# Altium PCB STM32F429.PcbDoc (part 1 of 2)
Units mm, origin at the board's own origin, x right, y up, seen from the top; angles counter-clockwise.
Board outline 66.8 x 95.4 mm, 2 copper layers (Top Layer, Bottom Layer); 134 components, 138 nets, 653 pads, 375 vias.
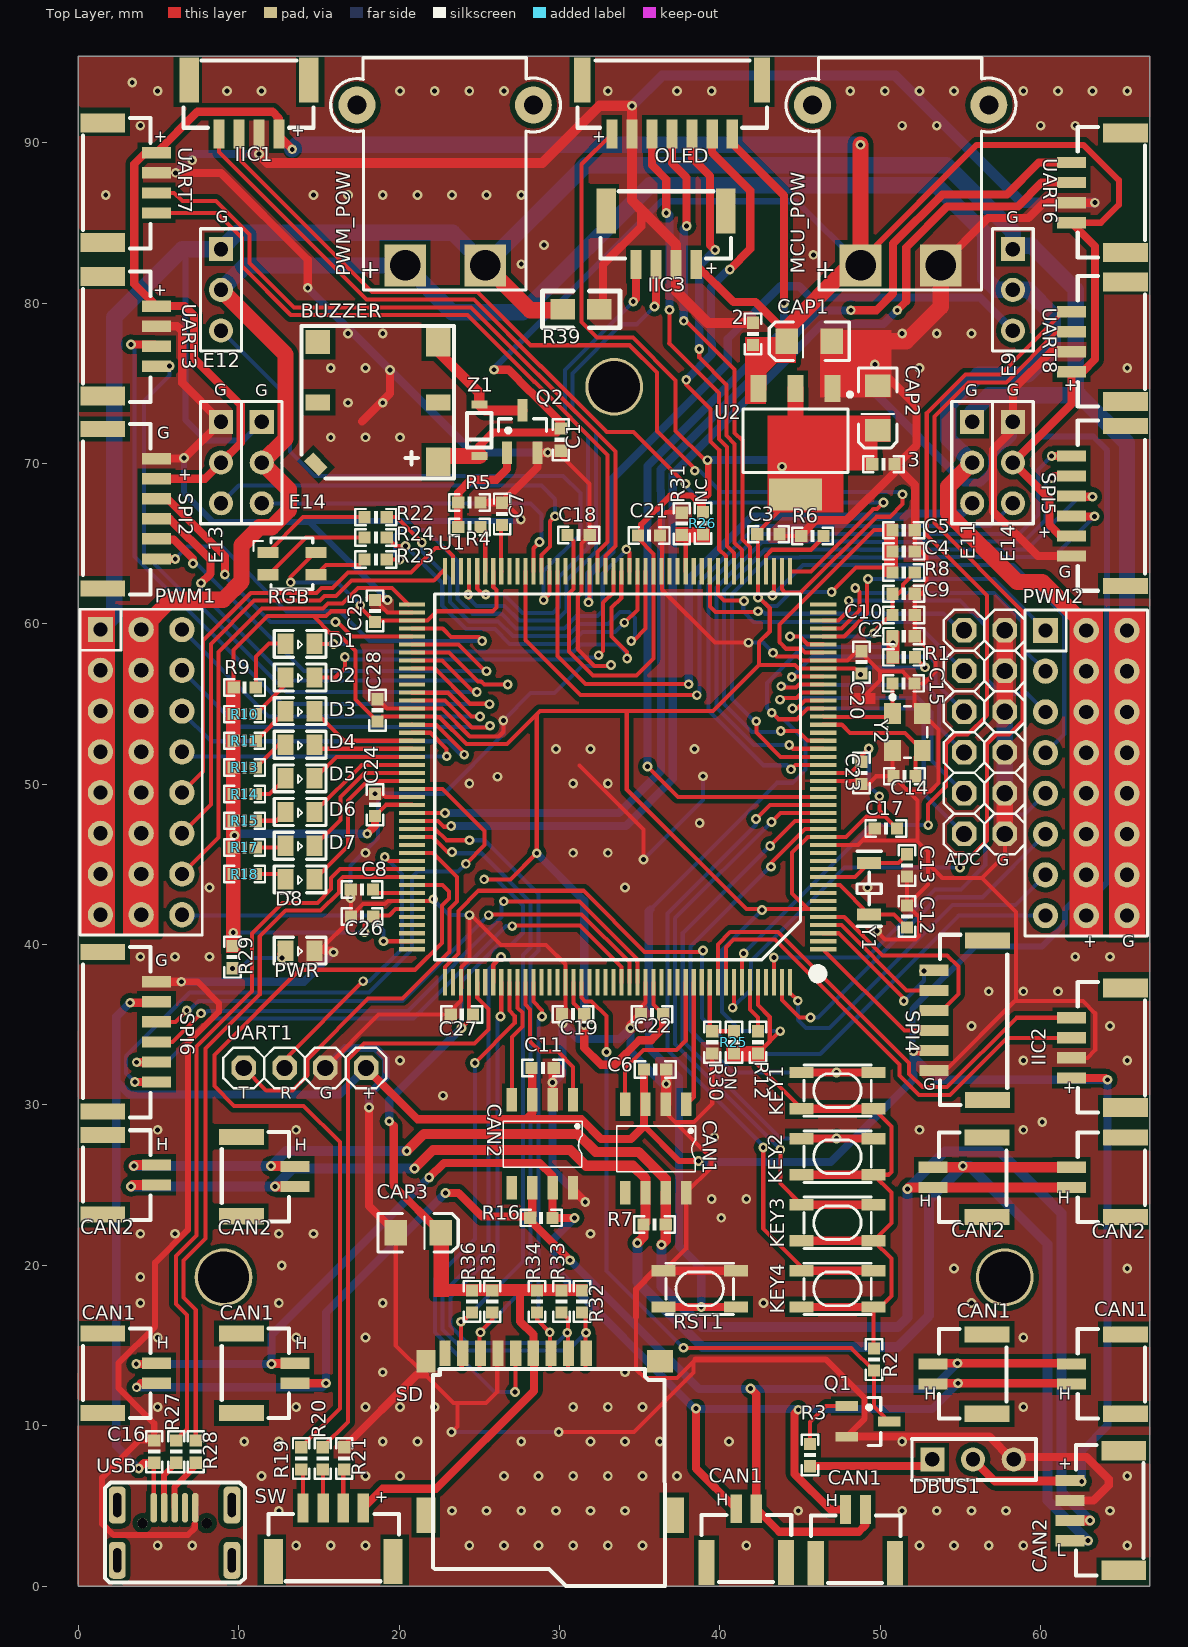
[diagram p0: Top Layer view]
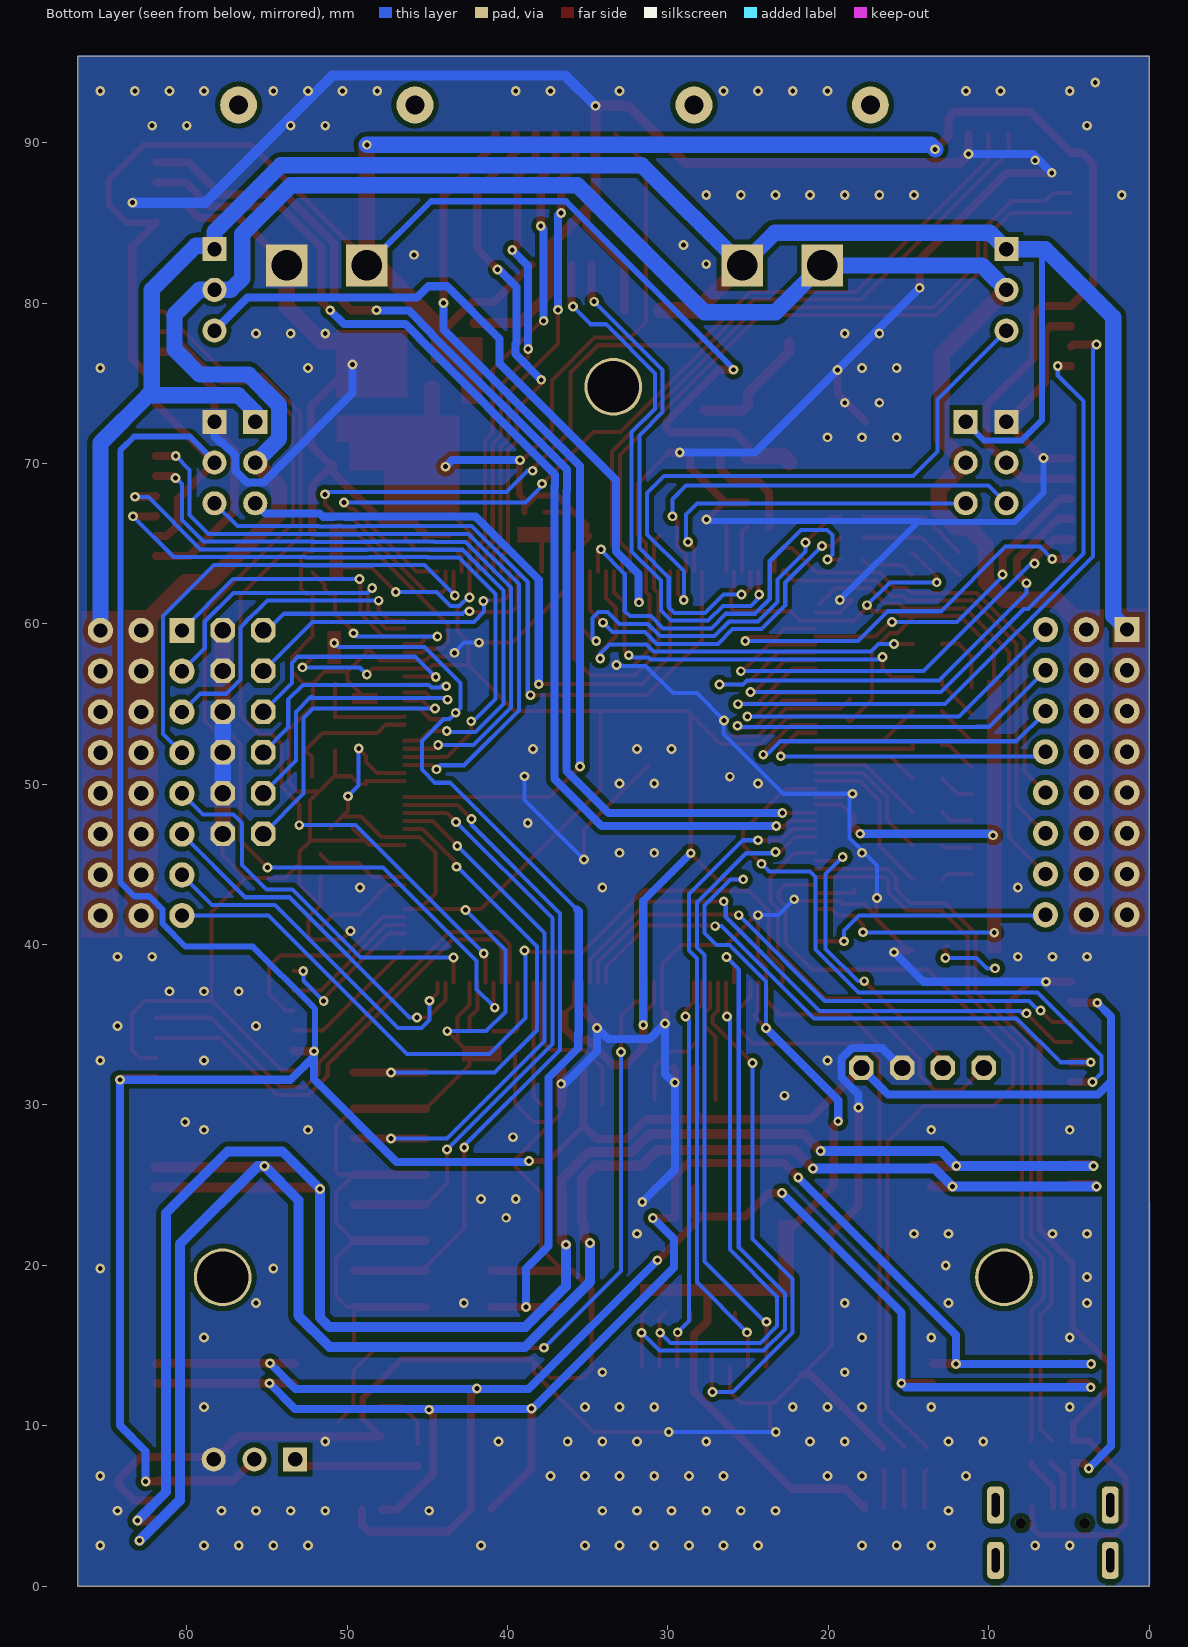
[diagram p1: Bottom Layer view, seen from below]

## Layer stack, top to bottom
Top Solder: solder mask 0.0102, Solder Resist, Dk 3.5
Top Layer: signal copper 0.0356
Dielectric 1: dielectric 0.32, FR-4, Dk 4.8
Bottom Layer: signal copper 0.0356
Bottom Solder: solder mask 0.0102, Solder Resist, Dk 3.5

## Board outline
0,0 0,95.402 66.802,95.402 66.802,0

## Design rules (kind name [scope] priority, off if disabled: settings)
Clearance [InPolygon] p1: gap=0.305 ignorepadtopadclearanceinfootprint=TRUE except(0: Arc-Hole Track-Hole SMDPad-Hole THPad-Hole Via-Hole Fill-Hole Poly-Hole Region-Hole Text-Hole)
Clearance Clearance_1 [All] p2: gap=0.229 ignorepadtopadclearanceinfootprint=TRUE except(0: Arc-Hole Track-Hole SMDPad-Hole THPad-Hole Via-Hole Fill-Hole Poly-Hole Region-Hole Text-Hole)
DiffPairsRouting [All] p1: maxlimit=25.4 minlimit=0.229 mostfreqgap=0.254 toplayer_minwidth=0.381 toplayer_maxwidth=25.4 toplayer_prefwidth=0.381 bottomlayer_minwidth=0.381 bottomlayer_maxwidth=25.4 bottomlayer_prefwidth=0.381 maxuncoupledlength=12.7
PlaneConnect [All] p1: planeconnectstyle=Direct reliefexpansion=0.508 reliefentries=4 reliefconductorwidth=0.254 reliefairgap=0.254
PolygonConnect [All] p1: connectstyle=Direct reliefconductorwidth=0.254 reliefentries=4 polygonreliefangle="90 Angle" airgapwidth=0.254
RoutingVias [All] p1: holewidth=0.711 width=1.27 viastyle="Through Hole" minholewidth=0.711 minwidth=1.27 maxholewidth=0.711 maxwidth=1.27
SolderMaskExpansion [All] p1: expansion=0.102
Width [All] p1: maxlimit=98.628 minlimit=0.229 preferedwidth=0.381
28 further rules are at their usual default settings.

## Classes and differential pairs
component class STM32F429: *2 CAN3

## Components (designator, comment, footprint, x,y, rotation, side; value= is the part's Value field where it differs from the comment)
2 "104" 0603P 42.062,78.08 r270 top
3 "104" 0603P 50.19,69.952 r180 top
ADC "ADC" ADC 55.22,46.901 r90 top (schematic designator *2)
BUZZER "BUZZER" BUZZER 13.919,69.062 r0 top (schematic designator *1)
C1 "10uF" 0603P 30.074,71.476 r90 top
C2 "104" 0603P 51.46,59.23 r180 top
C3 "104" 0603P 43.028,65.583 r180 top
C4 "104" 0603P 51.46,64.515 r180 top
C5 "225" 0603P 51.46,65.837 r180 top
C6 "104" 0603P 35.966,32.207 r180 top
C7 "225" 0603P 26.416,66.853 r90 top
C8 "225" 0603P 17.678,43.434 r180 top
C9 "10uF" 0603P 51.46,61.873 r180 top
C10 "104" 0603P 51.46,60.551 r180 top
C11 "104" 0603P 28.956,32.309 r180 top
C12 "6pF" 0603P 51.667,41.758 r270 top
C13 "6pF" 0603P 51.664,44.933 r90 top
C14 "22pF" 0603P 51.498,50.494 r0 top
C15 "22pF" 0603P 51.448,56.285 r180 top
C16 "104" 0603P 4.724,8.382 r90 top
C17 "104" 0603P 50.343,47.244 r0 top
C18 "104" 0603P 31.191,65.532 r180 top
C19 "104" 0603P 30.836,35.662 r0 top
C20 "104" 0603P 48.822,57.607 r270 top
C21 "104" 0603P 35.584,65.505 r180 top
C22 "104" 0603P 35.763,35.662 r0 top
C23 "104" 0603P 48.819,50.698 r90 top
C24 "104" 0603P 18.491,48.717 r270 top
C25 "104" 0603P 18.491,60.808 r270 top
C26 "104" 0603P 17.678,41.758 r0 top
C27 "104" 0603P 23.901,35.636 r0 top
C28 "104" 0603P 18.644,54.61 r270 top
CAN1 "HDR1x2-right" GH1.25-立贴-2P 61.925,12.597 r90 top (schematic designator CAN11)
CAN1 "HDR1x2-right" GH1.25-立贴-2P 53.289,12.597 r90 top (schematic designator CAN9)
CAN1 "HDR1x2-right" GH1.25-立贴-2P 4.864,13.899 r270 top (schematic designator CAN8)
CAN1 "HDR1x2-right" GH1.25-立贴-2P 47.823,4.775 r0 top (schematic designator CAN5)
CAN1 "HDR1x2-right" GH1.25-立贴-2P 13.51,13.898 r270 top (schematic designator CAN4)
CAN1 "TJA1050" SOIC-8_150mil 37.897,30.036 r270 top (schematic designator J1)
CAN1 "HDR1x2-right" GH1.25-立贴-2P 41.016,4.826 r0 top (schematic designator CAN3)
CAN2 "HDR1x2-right" GH1.25-立贴-2P 4.864,26.264 r270 top (schematic designator CAN10)
CAN2 "HDR1x2-right" GH1.25-立贴-2P 13.51,26.162 r270 top (schematic designator CAN7)
CAN2 "HDR1x2-right" GH1.25-立贴-2P 61.925,24.861 r90 top (schematic designator CAN6)
CAN2 "HDR1x4" GH1.25-立贴-4P 61.824,2.834 r90 top
CAN2 "TJA1050" SOIC-8_150mil 30.836,30.328 r270 top (schematic designator J2)
CAN2 "HDR1x2-right" GH1.25-立贴-2P 53.289,24.861 r90 top (schematic designator CAN1)
CAP1 "47uF" EIA3216 45.568,77.622 r180 top
CAP2 "47uF" EIA3216 49.835,73.457 r270 top
CAP3 "47uF" EIA3216 21.184,22.036 r0 top
D1 "LED" "0805 LED" 13.818,58.75 r0 top (schematic designator LED1)
D2 "LED" "0805 LED" 13.818,56.653 r0 top (schematic designator LED2)
D3 "LED" "0805 LED" 13.818,54.556 r0 top (schematic designator LED3)
D4 "LED" "0805 LED" 13.818,52.458 r0 top (schematic designator LED4)
D5 "LED" "0805 LED" 13.818,50.361 r0 top (schematic designator LED5)
D6 "LED" "0805 LED" 13.818,48.264 r0 top (schematic designator LED6)
D7 "LED" "0805 LED" 13.818,46.166 r0 top (schematic designator LED7)
D8 "LED" "0805 LED" 13.818,44.069 r0 top (schematic designator LED8)
DBUS1 "HDR1x3-right" PIN-1*3-2.54 53.238,7.899 r0 top
E9 "HDR1x3" HDR1X3 58.268,83.363 r270 top (schematic designator J3)
E11 "HDR1x3" HDR1X3 55.728,72.593 r270 top (schematic designator J4)
E12 "HDR1x3" HDR1X3 8.89,83.363 r270 top (schematic designator J5)
E13 "HDR1x3" HDR1X3 8.89,72.593 r270 top (schematic designator J13)
E14 "HDR1x3" HDR1X3 58.268,72.593 r270 top (schematic designator J12)
E14 "HDR1x3" HDR1X3 11.43,72.593 r270 top (schematic designator J6)
IIC1 "HDR1x4" GH1.25-立贴-4P 12.508,90.549 r180 top
IIC2 "HDR1x4" GH1.25-立贴-4P 61.925,31.687 r90 top
IIC3 "HDR1x4" GH1.25-立贴-4P 38.517,82.398 r180 top
KEY1 "KEY0" KEY_SOP324225 49.431,32.494 r180 top
KEY2 "KEY1" KEY_SOP324225 49.431,28.374 r180 top
KEY3 "KEY2" KEY_SOP324225 49.431,24.254 r180 top
KEY4 "KEY3" KEY_SOP324225 49.431,20.135 r180 top
MCU_POW "MCU_POWER" XT30_PWĸͷ 53.768,82.347 r180 top (schematic designator *9)
OLED "HDR1x7-left" GH1.25-立贴-7P 40.763,90.549 r180 top (schematic designator OLED1)
PWM1 "HDR3*8-right" "PIN-3*8-2.54 - duplicate" 1.372,59.639 r270 top
PWM2 "HDR3*8-left" "PIN-3*8-2.54 - duplicate" 60.3,59.588 r270 top
PWM_POW "PWM_POWER" XT30_PWĸͷ 25.371,82.347 r180 top (schematic designator *8)
PWR "LED" "0805 LED" 13.818,39.624 r0 top
Q1 "PMBT3904" SOT-23-3 49.174,10.262 r270 top
Q2 "S8050" SOT-23-3 27.686,71.933 r0 top
R1 "10K" 0603P 51.46,57.912 r0 top
R2 "4.7k" 0603P 49.606,14.122 r90 top
R3 "4.7k" 0603P 45.618,8.179 r270 top
R4 "510R" 0603P 24.384,66.04 r180 top
R5 "10K" 0603P 24.384,67.564 r180 top
R6 "10K" 0603P 45.771,65.481 r180 top
R7 "120R" 0603P 35.916,22.555 r0 top
R8 "10R" 0603P 51.46,63.194 r180 top
R9 "1K" 0603P 10.363,56.032 r0 top
R10 "1K" 0603P 10.363,54.371 r0 top
R11 "1K" 0603P 10.363,52.709 r0 top
R12 "0R" 0603P 42.367,33.909 r270 top
R13 "1K" 0603P 10.363,51.047 r0 top
R14 "1K" 0603P 10.363,49.385 r0 top
R15 "1K" 0603P 10.363,47.723 r0 top
R16 "120R" 0603P 28.854,22.962 r0 top
R17 "1K" 0603P 10.363,46.061 r0 top
R18 "1K" 0603P 10.363,44.399 r0 top
R19 "100R" 0603P 13.886,7.961 r90 top
R20 "100R" 0603P 15.231,7.961 r90 top
R21 "0R" 0603P 16.575,7.961 r90 top
R22 "220R" 0603P 18.542,66.65 r180 top
R23 "220R" 0603P 18.542,64.008 r180 top
R24 "220R" 0603P 18.542,65.38 r180 top
R25 "10K" 0603P 40.87,33.909 r270 top
R26 "10K" 0603P 38.937,66.269 r270 top
R27 "22R" 0603P 6.096,8.382 r90 top
R28 "22R" 0603P 7.315,8.382 r90 top
R29 "510R" 0603P 9.601,39.218 r270 top
R30 "10K" 0603P 39.522,33.909 r270 top
R31 "10K" 0603P 37.617,66.243 r270 top
R32 "10K" 0603P 31.394,17.755 r270 top
R33 "10K" 0603P 30.124,17.755 r270 top
R34 "10K" 0603P 28.6,17.755 r270 top
R35 "10K" 0603P 25.806,17.755 r270 top
R36 "10K" 0603P 24.536,17.755 r270 top
R39 "0R" 0805 30.201,79.605 r0 top
RGB "LED-TRICOLOR" rgb 13.31,63.754 r90 top
RST1 "KEY_M" KEY_SOP324225 40.843,20.135 r180 top
SD "TF-SD" TF 29.413,9.474 r270 top (schematic designator 1)
SPI2 "SPI_HDR1*6" GH1.25-立贴-6P 4.864,70.298 r270 top (schematic designator *4)
SPI4 "SPI_HDR1*6" GH1.25-立贴-6P 53.34,32.146 r90 top (schematic designator *5)
SPI5 "SPI_HDR1*6" GH1.25-立贴-6P 61.925,64.22 r90 top (schematic designator *6)
SPI6 "SPI_HDR1*6" GH1.25-立贴-6P 4.864,37.684 r270 top (schematic designator *7)
SW "SW_JLINK" GH1.25-立贴-4P 14.01,4.877 r0 top (schematic designator *3)
U1 "STM32F429IGT6" LQFP176 46.43,39.708 r180 top
U2 "AMS1117 3.3" SOT_223 44.704,71.421 r180 top
UART1 "Bluetooth" 1X04 9.042,32.309 r180 top (schematic designator J7)
UART3 "USART3" GH1.25-立贴-4P 4.864,79.807 r270 top (schematic designator J8)
UART6 "USART6" GH1.25-立贴-4P 61.925,85.008 r90 top (schematic designator J10)
UART7 "USART7" GH1.25-立贴-4P 4.864,89.369 r270 top (schematic designator J9)
UART8 "USART8" GH1.25-立贴-4P 61.925,75.712 r90 top (schematic designator J11)
USB "MF-CON-MICROUSB-RIGHT" micro_usb 5.994,0.457 r0 top
Y1 "32.768KHz" XTAL3215 49.301,45.085 r270 top
Y2 "25Mhz" XTAL3225 50.766,54.405 r270 top
Z1 "MMSZ4684" SOD-123 24.994,73.66 r270 top

## Footprints (in the part's own frame and the unit in brackets; to place one, negate y for a bottom-side part, rotate by r counter-clockwise, add the part's x,y. Pads: shape width x height; smd on the part's side, far side on the other; paste and mask are expansions set on the pad)
1X04 [mil] "1X08"
  oct 60x60 hole 40: 1(-350,0) 2(-250,0) 3(-150,0) 4(-50,0)
  silkscreen extent -400,-50 0,50
0603P [mil]
  rect 30x30 smd: 1(-27,0) 2(27.5,-0.06)
  silkscreen extent -50,-20 50,20
0805 [mil]
  rect 60x50 smd: 1(0,-0.06) 2(90,-0.06)
  silkscreen extent -50,-45 140,45
"0805 LED" [mm]
  rect 1x1.27 smd: 1(-0.914,0) 2(0.914,0)
  silkscreen extent -1.6,-0.84 1.63,0.84
ADC [mil]
  oct 60x60 hole 40: 0(0,0) 1(100,0) 2(200,0) 3(300,0) 4(400,0) 5(500,0) 6(0,-100) 6(100,-100) 6(200,-100) 6(300,-100) 6(400,-100) 6(500,-100)
  silkscreen extent -50,-150 550,50
BUZZER [mil]
  rect 51.18x31.5 smd rot 135: 0(35,35)
  rect 60x60 smd: 0(40,335)
  rect 60x39.37 smd: 0(40,187.01) 0(335,187.01)
  rect 60x70.87 smd: 1(335,40) 2(335,335)
  silkscreen extent 0,0 374,374
EIA3216 [mm] "EIA3216"
  rect 1.4x1.6 smd: A(1.4,0) C(-1.4,0)
  silkscreen extent -2.5,-1.2 2.5,1.2
GH1.25-立贴-2P [mm] "1.25 Connector"
  rect 1x2.8 smd: 0(-1.85,-3.35) 0(3.1,-3.35)
  rect 0.7x1.8 smd: 1(0,0) 2(1.25,0)
  silkscreen extent -2.16,-4.57 3.43,-0.38
GH1.25-立贴-4P [mm] "1.25 Connector"
  rect 1.2x2.8 smd: 0(-1.85,-3.35) 0(5.6,-3.35)
  rect 0.7x1.8 smd: 1(0,0) 2(1.25,0) 3(2.5,0) 4(3.75,0)
  silkscreen extent -2.16,-4.57 5.97,-0.38
GH1.25-立贴-6P [mm] "1.25 Connector"
  rect 1x2.8 smd: 0(-1.85,-3.35) 0(8.1,-3.35)
  rect 0.7x1.8 smd: 1(0,0) 2(1.25,0) 3(2.5,0) 4(3.75,0) 5(5,0) 6(6.25,0)
  silkscreen extent -2.16,-4.57 8.47,-0.38
GH1.25-立贴-7P [mm] "1.25 Connector"
  rect 1x2.8 smd: 0(-1.85,-3.35) 0(9.35,-3.35)
  rect 0.7x1.8 smd: 1(0,0) 2(1.25,0) 3(2.5,0) 4(3.75,0) 5(5,0) 6(6.25,0) 7(7.5,0)
  silkscreen extent -2.16,-4.57 9.65,-0.38
HDR1X3 [mm]
  rect 1.5x1.5 hole 0.9: 1(0,0)
  round 1.5 hole 0.9: 2(2.54,0) 3(5.08,0)
  silkscreen extent -1.27,-1.27 6.35,1.27
KEY_SOP324225 [mm]
  rect 1.5x0.7 smd: 1(-0.15,2.725) 1(4.35,2.725) 2(-0.15,0.475) 2(4.35,0.475)
  silkscreen extent 0,0 4.2,3.2
LQFP176 [mm]
  rect 1.65x0.254 smd: 1(0,0) 2(0,-0.5) 3(0,-1) 4(0,-1.5) 5(0,-2) 6(0,-2.5) 7(0,-3) 8(0,-3.5) 9(0,-4) 10(0,-4.5) 11(0,-5) 12(0,-5.5) 13(0,-6) 14(0,-6.5) 15(0,-7) 16(0,-7.5) 17(0,-8) 18(0,-8.5) 19(0,-9) 20(0,-9.5) 21(0,-10) 22(0,-10.5) 23(0,-11) 24(0,-11.5) 25(0,-12) 26(0,-12.5) 27(0,-13) 28(0,-13.5) 29(0,-14) 30(0,-14.5) 31(0,-15) 32(0,-15.5) 33(0,-16) 34(0,-16.5) 35(0,-17) 36(0,-17.5) 37(0,-18) 38(0,-18.5) 39(0,-19) 40(0,-19.5) 41(0,-20) 42(0,-20.5) 43(0,-21) 44(0,-21.5) 89(25.631,-21.5) 90(25.631,-21) 91(25.631,-20.5) 92(25.631,-20) 93(25.631,-19.5) 94(25.631,-19) 95(25.631,-18.5) 96(25.631,-18) 97(25.631,-17.5) 98(25.631,-17) 99(25.631,-16.5) 100(25.631,-16) 101(25.631,-15.5) 102(25.631,-15) 103(25.631,-14.5) 104(25.631,-14) 105(25.631,-13.5) 106(25.631,-13) 107(25.631,-12.5) 108(25.631,-12) 109(25.631,-11.5) 110(25.631,-11) 111(25.631,-10.5) 112(25.631,-10) 113(25.631,-9.5) 114(25.631,-9) 115(25.631,-8.5) 116(25.631,-8) 117(25.631,-7.5) 118(25.631,-7) 119(25.631,-6.5) 120(25.631,-6) 121(25.631,-5.5) 122(25.631,-5) 123(25.631,-4.5) 124(25.631,-4) 125(25.631,-3.5) 126(25.631,-3) 127(25.631,-2.5) 128(25.631,-2) 129(25.631,-1.5) 130(25.631,-1) 131(25.631,-0.5) 132(25.631,0)
  rect 0.254x1.65 smd: 45(2.065,-23.566) 46(2.566,-23.566) 47(3.066,-23.566) 48(3.565,-23.566) 49(4.066,-23.566) 50(4.565,-23.566) 51(5.066,-23.566) 52(5.565,-23.566) 53(6.066,-23.566) 54(6.565,-23.566) 55(7.066,-23.566) 56(7.565,-23.566) 57(8.066,-23.566) 58(8.565,-23.566) 59(9.066,-23.566) 60(9.565,-23.566) 61(10.066,-23.566) 62(10.565,-23.566) 63(11.066,-23.566) 64(11.565,-23.566) 65(12.066,-23.566) 66(12.565,-23.566) 67(13.066,-23.566) 68(13.565,-23.566) 69(14.066,-23.566) 70(14.565,-23.566) 71(15.065,-23.566) 72(15.566,-23.566) 73(16.065,-23.566) 74(16.566,-23.566) 75(17.065,-23.566) 76(17.566,-23.566) 77(18.065,-23.566) 78(18.566,-23.566) 79(19.065,-23.566) 80(19.566,-23.566) 81(20.065,-23.566) 82(20.566,-23.566) 83(21.065,-23.566) 84(21.566,-23.566) 85(22.065,-23.566) 86(22.566,-23.566) 87(23.065,-23.566) 88(23.566,-23.566) 133(23.566,2.065) 134(23.065,2.065) 135(22.566,2.065) 136(22.065,2.065) 137(21.566,2.065) 138(21.065,2.065) 139(20.566,2.065) 140(20.065,2.065) 141(19.566,2.065) 142(19.065,2.065) 143(18.566,2.065) 144(18.065,2.065) 145(17.566,2.065) 146(17.065,2.065) 147(16.566,2.065) 148(16.065,2.065) 149(15.566,2.065) 150(15.065,2.065) 151(14.565,2.065) 152(14.066,2.065) 153(13.565,2.065) 154(13.066,2.065) 155(12.565,2.065) 156(12.066,2.065) 157(11.565,2.065) 158(11.066,2.065) 159(10.565,2.065) 160(10.066,2.065) 161(9.565,2.065) 162(9.066,2.065) 163(8.565,2.065) 164(8.066,2.065) 165(7.565,2.065) 166(7.066,2.065) 167(6.565,2.065) 168(6.066,2.065) 169(5.565,2.065) 170(5.066,2.065) 171(4.565,2.065) 172(4.066,2.065) 173(3.565,2.065) 174(3.066,2.065) 175(2.566,2.065) 176(2.065,2.065)
  silkscreen extent 0.03,-22.15 24.22,1.82
micro_usb [mm]
  rrect50% 1.05x2.3 hole 0.5 slot 1.5 at 90 deg: 0(-3.575,1.15) 0(-3.575,4.6) 0(3.575,1.15) 0(3.575,4.6)
  round 0.65 hole 0.65 unplated: 0(-2,3.475) 0(2,3.475)
  oct 0.4x1.85 smd: 1(-1.3,4.434) 2(-0.65,4.434) 3(0,4.434) 4(0.65,4.434) 5(1.3,4.434)
  silkscreen extent -4.34,-0.23 4.38,6.01
PIN-1*3-2.54 [mm]
  rect 1.5x1.5 hole 0.9: 1(0,0)
  round 1.5 hole 0.9: 2(2.54,0) 3(5.08,0)
  silkscreen extent -1.27,-1.27 6.48,1.27
"PIN-3*8-2.54 - duplicate" [mil] "PIn Header"
  rect 62x62 hole 35: 1(0,0)
  round 62 hole 35: 2(0,100) 3(0,200) 4(100,0) 5(100,100) 6(100,200) 7(200,0) 8(200,100) 9(200,200) 10(300,0) 11(300,100) 12(300,200) 13(400,0) 14(400,100) 15(400,200) 16(500,0) 17(500,100) 18(500,200) 19(600,0) 20(600,100) 21(600,200) 22(700,0) 23(700,100) 24(700,200)
  silkscreen extent -50,-50 750,250
rgb [mm] "LED-TRICOLOR-SMD-MF"
  rect 0.7x1.3 smd: A(0.7,-1.5) B(-0.7,-1.5) G(-0.7,1.5) R(0.7,1.5)
  silkscreen extent -1.6,-1.3 1.6,2.4
SOD-123 [mm]
  rect 0.5x1 smd: 1(0,0) 2(3.2,0)
  silkscreen extent 0.51,-0.76 2.67,0.76
SOIC-8_150mil [mm]
  rect 1.473x0.65 smd: 1(0,0) 2(0,-1.27) 3(0,-2.54) 4(0,-3.81) 5(5.5,-3.81) 6(5.5,-2.54) 7(5.5,-1.27) 8(5.5,0)
  silkscreen extent 1.35,-4.34 4.2,0.58, body extent -0.3,-4.34 5.7,0.56, height 1.7
SOT-23-3 [mil]
  rect 23.62x55 smd: 1(-38,-50) 2(37,-50) 3(0,54)
  silkscreen extent -59,0 59,33, body extent -57,-55 57,55, height 47
SOT_223 [mm]
  rect 1x1.7 smd: 1(-2.3,-3.25) 2(0,-3.25) 3(2.3,-3.25)
  rect 3.3x2 smd: 2(0,3.349)
  silkscreen extent -3.53,-3 3.28,1.98, body extent -3.25,-3.51 3.25,3.51, height 1.93
TF [mm]
  rect 1.4x1.6 smd: 0(-4.55,6.85)
  rect 1.6x0.7 smd: 1(-5.05,2.25) 2(-5.05,1.15) 3(-5.05,0.05) 4(-5.05,-1.05) 5(-5.05,-2.15) 6(-5.05,-3.25) 7(-5.05,-4.35) 8(-5.05,-5.45) 9(-5.05,-6.55)
  rect 1.4x1.2 smd: 10(-4.55,-7.75)
  rect 2.2x1.2 smd: 11(5.05,-7.75) 12(5.05,7.75)
  silkscreen extent -4.06,-7.29 9.47,7.15
XT30_PWĸͷ [mm]
  round 2.3 hole 1.2: 0(-3,-10) 0(8,-10)
  rect 2.6x2.6 hole 1.9: 1(5,0) 2(0,0)
  silkscreen extent -4.68,-12.95 9.64,1.52
XTAL3215 [mm]
  rect 0.75x1.5 smd: 1(0,0) 2(3.2,0)
  silkscreen extent -0.74,-0.75 3.94,0.75
XTAL3225 [mm]
  rect 1.3x1.05 smd: 1(0,0) 2(2.3,0) 3(2.3,1.85) 4(0,1.85)
  silkscreen extent -1.14,-0.33 2.74,2.17

## Part data
2 3 C1 C2 C3 C4 C5 C6 C7 C8 C9 C10 C11 C12 C13 C14 C15 C16 C17 C18 C19 C20 C21 C22 C23 C24 C25 C26 C27 C28: library part C
CAN1 CAN1 CAN1 CAN1 CAN1 CAN1 CAN2 CAN2 CAN2 CAN2 CAN2 DBUS1 E9 E11 E12 E13 E14 E14 IIC1 IIC2 IIC3 OLED PWM1 PWM2: "Connector"
CAN1 CAN2: "CANоƬ"
CAP1 CAP2 CAP3: library part CAP_POL1206, "Capacitor PolarizedThese are standard SMD and PTH capacitors. Normally 10uF, 47uF, and 100uF in electrolytic and tantalum varieties. Always verify the external diameter of the through hole cap, it varies with capacity, voltage, and manufacturer. The EIA devices should be standard."
KEY1 KEY2 KEY3 KEY4: library part KEY_M
Q1: "NPN Bipolar Transistor"
Q2: library part BJT, "NPN Bipolar Transistor"
R1 R6 R8 R9 R10 R11 R12 R13 R14 R15 R17 R18 R19 R20 R21 R22 R23 R24 R25 R26 R27 R28 R29 R30 R31 R32 R33 R34 R35 R36 R39: library part R
R2 R3 R4 R5 R7 R16: library part RES, "Resistance"
RGB: "Tri-Color LED SMDProven layout and schematic for triple color LED in SMD package - common anode. Spark Fun Electronics SKU : COM-07844"
U2: library part AMS1117
UART1 UART3 UART6 UART7 UART8: library part HDR1x4, "Connector"
USB: library part USB_MICRO_RIGHT, "Library:  MF_Connectors Description: 5 Pin USB Connectors. SLD is the shield connection. Usually tied to ground through a small ferrite bead.", 5V=5V, D+=D+, D-=D-, GND=GND, ID=ID, SHIELD=SHIELD, USBPORT="USB PORT"
Y1: library part XTAL, "普通晶振", LatestRevisionDate=17-Jul-2002, LatestRevisionNote="Re-released for DXP Platform.", Published=8-Jun-2000, Publisher="Altium Limited"
Y2: library part XTAL_3225, "3225贴片无源晶振"
Z1: library part Diode, "Zener Diode"

## Free pads (board coordinates)
  round 3.6 hole 3.2 unplated: 0(9.042,19.253) 0(57.76,19.253) 3(33.401,74.778)

## Via types
v1: diameter 0.61, hole 0.305, Top Layer to Bottom Layer, tented both sides, 375 vias

## Nets (pads, with @x,y where several pads share a name; then routed paths per layer and width w, separated by ;. In a path a pad name is that pad's centre, name@x,y a point inside that pad or via, vN(x,y) a via of type N, cw(c..) or ccw(c..) an arc to the next point about the centre after c; other vN are vias at no path point)
ADC123_IN10(PC0): ADC.0 U1.32 | length 18.9
  Top Layer w0.254: v1(44.526,54.712) 44.793,54.712 45.29,55.208 U1.32@46.43,55.208
  Bottom Layer w0.254: v1@44.45,54.559 44.602,54.712 52.121,54.712 52.705,54.127 52.705,49.416 ADC.0@55.22,46.901
ADC123_IN11(PC1): ADC.1 U1.33 | length 18.7
  Top Layer w0.254: v1(43.739,55.27) 43.84,55.372 44.771,55.372 45.107,55.708 U1.33@46.43,55.708
  Bottom Layer w0.254: v1(43.739,55.27) 43.84,55.372 52.124,55.372 52.175,55.423 52.226,55.372 52.277,55.423 53.188,54.512 53.188,51.473 ADC.1@55.22,49.441
ADC123_IN12(PC2): ADC.2 U1.34 | length 17
  Top Layer w0.254: v1(43.815,56.109) 43.891,56.032 44.749,56.032 44.925,56.208 U1.34@46.43,56.208
  Bottom Layer w0.254: v1(43.815,56.109) 43.891,56.185 44.049,56.185 44.202,56.032 44.749,56.032 44.901,56.185 52.756,56.185 53.67,55.27 53.67,53.53 ADC.2@55.22,51.981
ADC123_IN13(PC3): ADC.3 U1.35 | length 15.5
  Top Layer w0.254: v1(44.475,56.693) 44.526,56.693 44.628,56.794 44.714,56.708 U1.35@46.43,56.708
  Bottom Layer w0.254: v1(44.475,56.693) 44.501,56.693 44.602,56.794 45.756,57.948 53.055,57.948 53.442,57.562 53.442,56.299 ADC.3@55.22,54.521
ADC123_IN14(PC4): ADC.4 U1.54 | length 19
  Top Layer w0.254: U1.54@39.865,63.274 39.865,61.837 40.259,61.443 v1@41.25,61.443
  Bottom Layer w0.254: v1@41.25,61.443 41.453,61.239 41.453,60.763 42.094,60.122 52.159,60.122 ADC.4@55.22,57.061
  other v1: 41.504,61.417
ADC123_IN15(PC5): ADC.5 U1.55 | length 18.7
  Top Layer w0.254: U1.55@39.365,63.274 39.382,63.256 39.382,61.075 39.726,60.731 42.316,60.731 v1(42.367,60.782)
  Bottom Layer w0.254: v1(42.367,60.782) 42.393,60.808 42.63,60.808 42.808,60.63 53.937,60.63 54.966,59.601 ADC.5@55.22,59.601
B(PF15): R23.1 U1.65 | length 25.8
  Top Layer w0.254: R23.1@19.228,64.008 v1(20.041,64.008) ; v1(34.163,64.643) 34.365,64.441 U1.65@34.365,63.274
  Bottom Layer w0.254: v1(20.041,64.008) 19.736,64.313 19.736,65.526 20.066,65.856 21.692,65.856 23.647,63.901 23.647,61.55 24.568,60.63 26.372,60.63 27.286,59.715 30.293,59.715 31.055,60.477 32.36,60.477 32.69,60.808 32.69,63.12 34.163,64.594 v1(34.163,64.643)
BOOT0: R25.1 R30.1 U1.166 | length 4.5
  Top Layer w0.254: U1.166@39.365,37.643 39.365,34.752 R30.1@39.522,34.595 R25.1@40.87,34.595
BOOT1: R26.2 R31.2 U1.58 | length 2.4
  Top Layer w0.254: R31.2@37.616,65.545 37.865,65.296 U1.58@37.865,63.274
BUTTON_AD(PF4): OLED.1 U1.20 | length 56
  Top Layer w0.254: v1(35.484,51.105) 37.38,49.208 U1.20@46.43,49.208
  Top Layer w0.508: OLED.1@40.763,90.549 40.763,89.945 43.993,86.716 v1(43.993,80.01)
  Bottom Layer w0.508: v1(35.484,51.105) 35.484,69.85 43.993,78.359 v1(43.993,80.01)
BUZZER: R4.1 U1.83 | length 2.9
  Top Layer w0.254: R4.1@25.07,66.04 25.365,65.745 U1.83@25.365,63.274
CAN1_H: CAN1.1@4.864,13.899 CAN1.1@13.51,13.898 CAN1.1@41.016,4.826 CAN1.1@47.823,4.775 CAN1.1@53.289,12.597 CAN1.1@61.925,12.597 CAN2.7 R16.2 | length 98.2
  Top Layer w0.508: v1(3.607,13.843) 4.808,13.843 CAN1.1@4.864,13.899 ; v1(21.869,25.476) 22.784,26.391 28.759,26.391 29.566,25.584 CAN2.7@29.566,24.828 29.553,24.815 R16.2@29.553,22.96 v1(30.936,22.96) ; v1(38.506,11.074) 38.506,7.335 CAN1.1@41.016,4.826 ; v1(44.882,10.998) 44.653,10.77 44.653,6.999 46.877,4.775 CAN1.1@47.823,4.775 ; CAN1.1@53.289,12.597 53.341,12.649 v1(54.839,12.649) 61.873,12.649 CAN1.1@61.925,12.597 ; v1(12.04,13.843) 13.455,13.843 CAN1.1@13.51,13.898 12.095,13.898 v1(12.04,13.843)
  Bottom Layer w0.508: v1(3.607,13.843) v1(12.04,13.843) 12.04,15.646 v1(21.869,25.476) ; v1(30.936,22.96) 29.616,21.641 29.616,19.863 38.43,11.049 53.238,11.049 v1(54.839,12.649)
CAN1_L: CAN1.2@4.864,12.649 CAN1.2@13.51,12.648 CAN1.2@42.266,4.826 CAN1.2@49.073,4.775 CAN1.2@53.289,13.847 CAN1.2@61.925,13.847 CAN2.6 R16.1 | length 94.6
  Top Layer w0.508: v1(3.632,12.395) 3.886,12.649 CAN1.2@4.864,12.649 ; CAN1.2@13.51,12.648 v1(15.443,12.649) v1(15.443,12.649) ; v1(22.885,24.511) 23.698,24.511 25.173,23.036 28.094,23.036 R16.1@28.169,22.962 ; CAN2.6@28.296,24.828 28.296,23.089 R16.1@28.169,22.962 ; v1(30.658,20.32) 28.169,22.809 R16.1@28.169,22.962 ; v1(41.91,12.319) 42.266,11.963 CAN1.2@42.266,4.826 43.699,3.393 48.655,3.393 49.073,3.81 CAN1.2@49.073,4.775 ; CAN1.2@53.289,13.847 53.336,13.894 v1(54.813,13.894) 61.879,13.894 CAN1.2@61.925,13.847
  Bottom Layer w0.508: v1(3.632,12.395) 15.189,12.395 v1(15.443,12.649) 15.443,17.069 v1(22.885,24.511) ; v1(30.658,20.32) 38.684,12.294 53.213,12.294 v1(54.813,13.894)
CAN1_RX: CAN2.4@27.026,30.328 U1.142 | length 7.7
  Top Layer w0.254: CAN2.4@27.026,30.328 27.026,34.243 27.686,34.903 27.686,35.754 27.381,36.059 27.381,37.626 U1.142@27.365,37.643
CAN1_TX: CAN2.1@30.836,30.328 U1.143 | length 9.2
  Top Layer w0.254: U1.143@27.865,37.643 27.865,36.258 28.169,35.954 28.169,33.96 28.804,33.325 29.891,33.325 30.836,32.38 CAN2.1@30.836,30.328
CAN2_H: CAN1.7 CAN2.1@4.864,26.264 CAN2.1@13.51,26.162 CAN2.1@53.289,24.861 CAN2.1@61.925,24.861 CAN2.2@61.824,4.084 R7.2 | length 113.2
  Top Layer w0.635: v1(3.454,26.187) 3.531,26.264 CAN2.1@4.864,26.264 ; v1(12.014,26.187) 13.485,26.187 CAN2.1@13.51,26.162 ; v1(20.472,27.127) 21.539,28.194 31.14,28.194 32.258,27.076 34.922,27.076 36.627,25.372 CAN1.7@36.627,24.536 36.614,24.524 R7.2@36.614,22.554 36.614,21.552 v1(36.347,21.285) ; v1(51.689,24.765) 51.785,24.861 CAN2.1@53.289,24.861 CAN2.1@61.925,24.861 ; CAN2.2@61.824,4.084 v1(63.074,4.084)
  Bottom Layer w0.635: v1(3.454,26.187) v1(12.014,26.187) 12.954,27.127 v1(20.472,27.127) ; v1(36.347,21.285) 36.347,18.695 38.888,16.154 51.103,16.154 51.689,16.741 v1(51.689,24.765) 54.026,27.102 57.455,27.102 61.29,23.266 61.29,5.867 v1(63.074,4.084)
CAN2_L: CAN1.6 CAN2.1@61.824,2.834 CAN2.2@4.864,25.014 CAN2.2@13.51,24.912 CAN2.2@53.289,26.111 CAN2.2@61.925,26.111 R7.1 | length 109.6
  Top Layer w0.635: v1(3.282,24.912) 3.384,25.014 CAN2.2@4.864,25.014 ; v1(12.248,24.912) CAN2.2@13.51,24.912 ; v1(20.955,26.035) 22.111,27.191 30.67,27.191 31.648,26.213 34.564,26.213 35.357,25.42 CAN1.6@35.357,24.536 35.357,22.682 R7.1@35.23,22.555 35.23,21.768 v1(34.849,21.387) ; CAN2.2@53.289,26.111 CAN2.2@61.925,26.111
  Bottom Layer w0.635: v1(3.282,24.912) v1(12.248,24.912) 13.371,26.035 v1(20.955,26.035) ; v1(34.849,21.387) 34.849,18.973 38.912,14.91 51.079,14.91 53.035,16.866 53.035,24.079 v1(55.143,26.187) 55.575,26.187 60.427,21.336 60.427,5.359 v1(62.952,2.834)
CAN2_RX: CAN1.4 U1.163 | length 10.4
  Top Layer w0.254: CAN1.4@34.087,30.036 34.087,32.293 35.221,33.426 37.287,33.426 37.865,34.004 U1.163@37.865,37.643
CAN2_TX: CAN1.1@37.897,30.036 U1.164 | length 7.8
  Top Layer w0.254: CAN1.1@37.897,30.036 38.365,30.504 U1.164@38.365,37.643
G(PF14): R24.1 U1.64 | length 22.5
  Top Layer w0.254: R24.1@19.228,65.38 19.761,64.846 v1(20.396,64.846) ; v1(34.036,60.071) 34.061,60.071 34.865,60.874 U1.64@34.865,63.274
  Bottom Layer w0.254: v1(20.396,64.846) 22.682,62.56 22.682,61.15 24.168,59.665 25.972,59.665 26.886,58.75 30.692,58.75 31.429,59.487 33.452,59.487 v1(34.036,60.071)
GND: 2.1 3.1 ADC.6 C1.1 C2.1 C3.1 C4.1 C5.1 C6.1 C7.2 C8.2 C9.1 C10.1 C11.1 C12.1 C13.1 C14.1 C15.1 C16.2 C17.1 C18.1 C19.1 C20.1 C21.1 C22.1 C23.1 C24.1 C25.1 C26.1 C27.1 C28.1 CAN1.2@36.627,30.036 CAN1.8 CAN2.2@29.566,30.328 CAN2.3@61.824,5.334 CAN2.8 CAP1.C CAP2.C CAP3.C DBUS1.3 E13.1 E14.1@58.268,72.593 IIC1.2 IIC2.2 IIC3.2 MCU_POW.2 OLED.6 PWR.2 Q1.2 Q2.2 R5.1 R6.2 R21.2 R30.2 R31.1 R39.2 RST1.2 SD.6 SD.10 SPI2.1 SPI4.1 SPI5.1 SPI6.1 U1.14 U1.22 U1.37 U1.61 U1.71 U1.90 U1.102 U1.113 U1.126 U1.135 U1.148 U1.158 U2.1 UART1.2 UART3.2 UART6.2 UART7.2 UART8.2 USB.5 Y2.2 Y2.4 | length 711.3
  Top Layer w0.254: PWR.2@14.732,39.624 15.037,39.624 16.993,41.58 C26.1@16.993,41.758 ; UART1.2@15.392,32.309 18.72,35.636 C27.1@23.216,35.636 ; C8.2@16.993,43.423 C26.1@16.993,41.758 ; v1(18.491,49.403) 18.898,49.403 18.923,49.428 19.143,49.208 U1.113@20.799,49.208 ; C28.1@18.644,55.296 19.231,54.708 U1.102@20.799,54.708 22.676,54.708 24.399,52.984 26.207,52.984 26.492,53.27 v1(26.492,53.975) ; v1(19.279,61.493) C25.1@18.491,61.493 19.276,60.708 U1.90@20.799,60.708 ; CAP3.C@19.784,22.036 19.784,15.015 21.612,13.186 23.394,11.405 23.622,11.405 ; v1(22.123,42.824) 22.007,42.708 U1.126@20.799,42.708 19.289,42.708 19.101,42.52 17.755,42.52 C26.1@16.993,41.758 ; C27.1@23.216,35.662 23.015,35.662 23.865,36.511 23.865,37.287 23.882,37.305 23.882,38.615 24.384,39.117 v1(24.384,41.834) 24.491,41.834 26.346,39.98 29.16,39.98 30.365,38.774 U1.148@30.365,37.643 30.365,35.904 30.378,35.89 C19.1@30.15,35.662 ; v1(23.266,9.601) 23.622,9.957 23.622,11.405 ; 26.112,13.686 26.112,12.092 25.425,11.405 23.622,11.405 ; v1(29.947,9.601) 34.63,9.601 38.354,13.325 38.354,14.008 ; C1.1@29.947,70.663 31.877,68.732 C18.1@31.877,65.532 31.365,65.02 U1.71@31.365,63.274 31.365,61.995 31.14,61.77 31.14,58.4 32.162,57.379 33.147,57.379 v1(33.198,57.429) ; 31.242,51.156 35.23,47.168 v1(35.23,45.314) ; 34.773,16.782 34.773,13.512 35.316,12.969 37.315,12.969 38.354,14.008 ; C22.1@35.077,35.662 35.077,36.093 35.365,36.381 U1.158@35.365,37.643 ; RST1.2@36.493,19.66 37.897,21.063 CAN1.8@37.897,24.536 39.472,26.111 39.472,26.67 37.197,28.944 ; CAN1.2@36.627,30.036 36.627,29.515 37.197,28.944 ; R31.1@37.694,66.954 36.627,66.954 36.27,66.597 C21.1@36.27,65.505 36.382,65.392 36.382,62.125 39.681,58.826 v1(41.783,58.826) ; 38.481,14.135 38.354,14.008 ; R30.2@39.521,33.21 39.521,30.096 38.369,28.944 37.197,28.944 ; v1(43.307,58.191) 43.536,57.963 44.856,57.963 45.11,57.708 U1.37@46.43,57.708 47.955,57.708 48.539,58.293 C20.1@48.822,58.293 48.822,58.172 49.971,57.023 ; C3.1@43.612,65.481 43.613,65.483 R6.2@45.072,65.483 ; U1.14@46.43,46.208 48.621,46.208 48.895,46.482 ; U1.22@46.43,50.208 48.819,50.208 C23.1@48.819,50.013 49.251,50.013 49.732,50.494 C14.1@50.813,50.494 ; 48.692,55.194 49.971,56.473 49.971,57.023 ; C17.1@49.657,47.244 48.895,46.482 ; v1(49.784,40.843) 50.305,40.322 52.194,40.322 52.402,40.531 52.402,41.708 C12.1@51.667,42.443 ; Y2.2@50.766,52.105 50.766,50.54 C14.1@50.813,50.494 ; C13.1@51.664,44.247 51.667,44.244 C12.1@51.667,42.443 ; C5.1@52.146,65.837 C4.1@52.146,64.515 52.528,64.515 52.883,64.16 52.883,62.179 52.576,61.873 C9.1@52.146,61.873 C2.1@52.146,59.23 53.442,57.935 53.442,57.015 52.712,56.285 C15.1@52.133,56.285 ; SPI4.1@53.34,32.146 54.051,32.146 58.38,36.474 ; ADC.6@57.76,46.901 57.76,45.578 56.326,44.145 ; IIC2.2@61.925,32.937 62.909,32.937 63.398,33.426 63.398,35.717 62.641,36.474 58.38,36.474 ; 48.895,46.482 52.273,46.482 52.324,46.431 ; 49.971,57.023 51.395,57.023 C15.1@52.133,56.285 ; C14.1@50.813,50.494 51.751,49.555 ; C12.1@51.667,42.443 52.959,43.736 52.959,45.796 ; 51.751,49.555 53.111,49.555 53.619,50.063 53.619,53.402 Y2.4@52.616,54.405 52.133,54.888 C15.1@52.133,56.285 ; 51.751,49.555 52.324,48.982 52.324,46.431 ; 52.324,46.431 52.959,45.796 ; 52.959,45.796 52.959,45.047 53.861,44.145 56.326,44.145 ; 56.326,44.145 58.446,42.026 58.446,36.54 58.38,36.474
  Top Layer w0.381: v1(6.417,37.684) 7.426,37.684 8.763,36.347 8.763,35.806 6.82,33.863 6.82,22.212 4.775,20.168 4.775,16.18 2.489,13.894 2.489,12.37 4.726,10.133 C16.2@4.726,9.08 3.797,9.08 1.475,6.759 1.475,3.887 2.175,3.188 6.82,3.188 7.25,3.618 7.25,3.879 ; USB.5@7.294,4.285 USB.5@7.294,4.891 ; C7.2@26.418,67.551 26.53,67.551 v1(27.584,66.497) ; 34.773,16.782 34.773,18.517 35.916,19.66 RST1.2@36.493,19.66 ; 38.481,14.135 46.587,14.135 49.022,11.7 49.022,10.439 Q1.2@48.108,9.525
  Top Layer w0.508: SPI6.1@4.864,37.684 v1(6.417,37.684) ; SPI2.1@4.864,70.298 6.595,70.298 E13.1@8.89,72.593 6.477,75.006 6.477,78.232 6.152,78.557 UART3.2@4.864,78.557 ; v1(6.064,88.119) 8.883,88.119 14.3,82.702 v1(14.3,80.95) ; v1(11.258,89.286) IIC1.2@11.258,90.549 ; PWR.2@15.037,39.624 15.799,39.624 v1(15.9,39.522) ; R21.2@16.577,8.66 21.103,13.186 21.612,13.186 ; 17.678,72.619 19.431,74.371 v1(19.431,75.819) ; v1(18.11,29.845) 18.11,23.71 CAP3.C@19.784,22.036 ; R5.1@25.07,67.564 26.405,67.564 C7.2@26.418,67.551 28.626,69.759 Q2.2@28.626,70.663 C1.1@29.947,70.663 ; CAN2.2@29.566,30.328 29.566,32.233 C11.1@29.642,32.309 ; C19.1@30.15,35.662 v1(30.175,35.077) ; CAN2.8@30.836,24.828 30.836,24.714 v1(31.598,23.952) ; R39.2@32.715,79.553 32.715,82.405 35.09,84.78 35.09,85.814 ; v1(34.417,34.798) 34.417,35.001 C22.1@35.077,35.662 ; RST1.2@36.493,19.66 RST1.2@40.993,19.66 ; R6.2@45.072,65.483 45.072,65.541 46.003,66.472 47.901,66.472 50.876,69.447 3.1@50.876,69.952 ; Q1.2@47.904,9.322 56.794,9.322 58.217,7.899 58.369,8.052 62.865,8.052 64.237,6.68 64.237,6.274 63.297,5.334 CAN2.3@61.824,5.334 ; v1(49.657,76.175) 52.248,73.584 52.248,71.12 51.079,69.952 3.1@50.876,69.952 ; C5.1@52.146,65.837 52.172,65.862 52.172,68.656 3.1@50.876,69.952 ; MCU_POW.2@53.768,82.347 56.714,85.293 59.233,85.293 60.198,86.258 UART6.2@61.925,86.258 v1(63.373,86.258) ; SPI5.1@61.925,64.22 59.817,64.22 57.035,67.003 57.035,70.878 58.268,72.111 E14.1@58.268,72.593 58.268,74.6 60.63,76.962 UART8.2@61.925,76.962
  Top Layer w0.635: v1(11.258,89.286) 11.809,88.735 28.921,88.735 32.485,92.298 v1(34.513,92.298) OLED.6@34.513,90.549 34.513,86.391 35.09,85.814 37.267,83.637 IIC3.2@37.267,82.398 37.267,80.741 39.243,78.765 2.1@42.062,78.765 ; CAN1.2@36.627,30.036 36.652,30.062 v1(36.652,31.318) C6.1@36.652,32.207
  Top Layer w1.016: CAP1.C@46.968,77.622 51.613,77.622 53.768,79.778 MCU_POW.2@53.768,82.347 ; ADC.6@57.76,46.901 ADC.6@57.76,49.441 ; ADC.6@57.76,54.521 ADC.6@57.76,57.061 ADC.6@57.76,59.601
  Bottom Layer w0.254: v1(16.967,42.901) 16.967,44.938 18.669,46.64 18.669,49.225 v1(18.491,49.403) 22.727,49.403 22.753,49.428 22.778,49.403 26.518,53.143 v1@26.518,53.95 ; v1(22.123,42.824) 23.114,41.834 v1(24.384,41.834) ; v1(23.266,9.601) v1(29.947,9.601) ; v1(26.492,53.975) 28.194,55.677 29.689,55.677 31.391,57.379 33.147,57.379 v1(33.198,57.429) ; v1(35.23,45.314) 38.938,49.022 v1(38.938,50.495) ; v1(41.783,58.826) 42.697,58.826 v1@43.282,58.242
  Bottom Layer w0.381: v1(6.579,70.333) 6.579,68.171 8.406,66.344 14.224,66.344 ; v1(19.279,61.493) 14.428,66.344 14.224,66.344 ; v1(27.584,66.497) 27.49,66.402 14.282,66.402 14.224,66.344
  Bottom Layer w0.508: v1(6.064,88.119) 7.231,89.286 v1(11.258,89.286) ; v1(6.417,37.684) 14.062,37.684 v1(15.9,39.522) ; v1(14.3,80.95) v1(19.431,75.819) 24.562,70.688 v1(29.261,70.688) ; UART1.2@15.392,32.309 16.637,33.553 18.513,33.553 19.177,32.89 19.177,31.728 18.11,30.661 v1(18.11,29.845) ; v1(31.598,23.952) 29.566,25.984 v1(29.566,31.394) 29.591,31.394 29.616,31.369 30.175,31.928 v1(30.175,35.077) 31.14,34.112 33.731,34.112 v1(34.417,34.798) 34.417,33.35 36.449,31.318 v1(36.652,31.318) ; v1(49.657,76.175) 49.657,74.381 55.217,68.821 56.238,68.821 56.96,69.543 56.96,70.489 57.757,71.286 57.861,71.286 58.268,71.692 E14.1@58.268,72.593
  Bottom Layer w0.635: v1(34.513,92.298) 36.398,94.183 50.927,94.183 58.852,86.258 v1(63.373,86.258)
  Bottom Layer w1.016: ADC.6@57.76,49.441 ADC.6@57.76,51.981 ADC.6@57.76,54.521
  other v1: 4.94,2.54 7.099,2.54 13.576,2.54 15.735,2.54 17.894,2.54 24.371,2.54 26.53,2.54 28.689,2.54 30.848,2.54 33.007,2.54 35.166,2.54 41.643,2.54 52.438,2.54 54.597,2.54 56.756,2.54 58.915,2.54 65.392,2.54 12.497,4.699 23.292,4.699 25.451,4.699 27.61,4.699 29.769,4.699 31.928,4.699 34.087,4.699 44.882,4.699 51.359,4.699 53.518,4.699 55.677,4.699 57.836,4.699 64.313,4.699 11.417,6.858 17.894,6.858 20.053,6.858 26.53,6.858 28.689,6.858 30.848,6.858 33.007,6.858 35.166,6.858 37.325,6.858 65.392,6.858 10.338,9.017 12.497,9.017 18.974,9.017 21.133,9.017 27.61,9.017 31.928,9.017 34.087,9.017 36.246,9.017 40.564,9.017 51.359,9.017 4.94,11.176 13.576,11.176 17.894,11.176 20.053,11.176 22.212,11.176 30.848,11.176 33.007,11.176 35.166,11.176 58.915,11.176 18.974,13.335 34.087,13.335 4.94,15.494 13.576,15.494 17.894,15.494 58.915,15.494 3.861,17.653 12.497,17.653 18.974,17.653 42.723,17.653 55.677,17.653 3.861,19.279 54.597,19.812 65.392,19.812 12.675,19.99 3.861,21.971 6.02,21.971 12.497,21.971 14.656,21.971 31.928,21.971 40.081,22.962 39.484,24.13 41.643,24.13 39.649,27.991 4.94,28.448 13.576,28.448 52.438,28.448 58.915,28.448 60.096,28.931 22.733,30.582 20.053,32.766 58.915,32.766 65.392,32.766 55.677,34.925 64.313,34.925 56.756,37.084 58.915,37.084 61.074,37.084 3.861,39.243 6.02,39.243 8.179,39.243 62.154,39.243 64.313,39.243 8.179,43.561 34.087,43.561 49.2,43.561 17.894,45.72 30.848,45.72 33.007,45.72 38.735,47.574 24.371,50.038 30.848,50.038 33.007,50.038 26.137,50.47 29.769,52.197 31.928,52.197 38.405,52.197 15.735,71.628 17.894,71.628 20.053,71.628 16.815,73.787 18.974,73.787 15.735,75.946 17.894,75.946 52.438,75.946 65.392,75.946 16.815,78.105 18.974,78.105 51.359,78.105 53.518,78.105 55.677,78.105 27.61,82.423 45.822,83.007 29.032,83.617 1.702,86.741 14.656,86.741 16.815,86.741 18.974,86.741 21.133,86.741 23.292,86.741 25.451,86.741 27.61,86.741 7.099,88.9 3.861,91.059 51.359,91.059 53.518,91.059 59.995,91.059 62.154,91.059 4.94,93.218 9.258,93.218 11.417,93.218 20.053,93.218 22.212,93.218 24.371,93.218 26.53,93.218 33.007,93.218 37.325,93.218 39.484,93.218 48.12,93.218 50.279,93.218 52.438,93.218 54.597,93.218 58.915,93.218 61.074,93.218 63.233,93.218 65.392,93.218 3.353,93.751
I2C1_SCL(PB8): IIC2.4 U1.167 | length 31
  Top Layer w0.254: U1.167@39.865,37.643 39.865,40.017 40.64,40.792 43.623,40.792 51.791,32.625 51.791,31.942 52.618,31.115 54.156,31.115 58.478,35.437 IIC2.4@61.925,35.437
I2C1_SDA(PB9): IIC2.3 U1.168 | length 29.8
  Top Layer w0.254: U1.168@40.365,37.643 40.365,39.835 40.84,40.31 43.423,40.31 51.206,32.526 51.206,31.844 52.418,30.632 54.356,30.632 57.911,34.187 IIC2.3@61.925,34.187
I2C2_SCL(PH4): IIC1.4 U1.45 | length 59.3
  Top Layer w0.254: IIC1.4@8.758,90.549 8.758,89.413 17.962,80.209 24.671,80.209 28.819,76.06 28.838,76.06 32.942,71.956 34.622,71.956 v1(37.846,68.732) ; U1.45@44.365,63.274 45.676,63.274 49.56,67.158 49.784,67.158 v1(50.19,67.564)
  Bottom Layer w0.254: v1(37.846,68.732) 37.846,68.656 37.821,68.631 38.887,67.564 v1(50.19,67.564)
I2C2_SDA(PH5): IIC1.3 U1.46 | length 65.4
  Top Layer w0.254: IIC1.3@10.008,90.549 10.008,88.976 18.293,80.691 24.871,80.691 28.193,77.368 34.366,77.368 36.068,75.667 36.068,72.009 38.43,69.647 v1(38.43,69.545) ; U1.46@43.865,63.274 43.865,62.155 44.069,61.951 45.035,61.951 49.76,66.675 50.597,66.675 51.384,67.462 v1(51.384,68.072)
  Bottom Layer w0.254: v1(38.43,69.545) 38.735,69.545 40.056,68.224 51.232,68.224 v1(51.384,68.072)
I2C3_SCL(PH7): IIC3.4 U1.84 | length 31.7
  Top Layer w0.254: U1.84@24.865,63.274 24.865,62.201 25.4,61.665 v1(25.4,61.824)
  Top Layer w0.508: v1(34.595,80.086) 34.767,80.259 IIC3.4@34.767,82.398
  Bottom Layer w0.254: v1(25.4,61.824) 26.543,61.824 27.686,60.681 29.594,60.681 29.947,61.033 29.947,62.89 31.775,64.719 31.775,71.755 30.328,73.203 30.328,75.819 v1(34.595,80.086)
I2C3_SDA(PH8): IIC3.3 U1.85 | length 34.7
  Top Layer w0.254: v1(24.308,61.824) 24.308,61.684 24.365,61.627 U1.85@24.365,63.274
  Top Layer w0.508: v1(35.916,79.781) 36.017,79.883 IIC3.3@36.017,82.398
  Bottom Layer w0.254: v1(24.308,61.824) 24.308,61.626 24.822,61.112 26.572,61.112 27.486,60.198 29.794,60.198 30.429,60.833 30.429,62.691 32.258,64.519 32.258,71.955 30.81,73.403 30.81,75.619 33.871,78.679 34.814,78.679 v1(35.916,79.781)
KEY0(PF0): KEY1.2 U1.16 | length 31.4
  Top Layer w0.254: v1(43.18,44.856) 43.18,45.095 45.293,47.208 U1.16@46.43,47.208
  Top Layer w0.508: KEY1.2@45.081,32.019 v1(47.269,32.019) KEY1.2@49.581,32.019
  Bottom Layer w0.254: v1(43.18,44.856) 43.135,44.856 38.163,39.885 38.163,34.658 40.803,32.019 v1(47.269,32.019)
KEY1(PF1): KEY2.2 U1.17 | length 35
  Top Layer w0.254: v1(43.129,46.152) 44.686,47.708 U1.17@46.43,47.708
  Top Layer w0.508: KEY2.2@45.081,27.899 KEY2.2@49.581,27.899
  Bottom Layer w0.254: v1(43.129,46.152) 43.104,46.152 37.681,40.729 37.681,33.998 43.764,27.915 v1(47.269,27.915)
KEY2(PF2): KEY3.2 U1.18 | length 37.6
  Top Layer w0.254: v1(43.205,47.65) 43.763,48.208 U1.18@46.43,48.208 ; v1(43.764,27.229) 43.764,25.096 KEY3.2@45.081,23.779
  Top Layer w0.508: KEY3.2@45.081,23.779 KEY3.2@49.581,23.779
  Bottom Layer w0.254: v1(43.205,47.65) 37.198,41.643 37.198,33.795 v1(43.764,27.229)
KEY3(PF3): KEY4.2 U1.19 | length 44.6
  Top Layer w0.254: v1(42.24,47.828) 43.12,48.708 U1.19@46.43,48.708 ; v1(42.697,27.356) 42.697,22.31 45.348,19.66 46.838,19.66
  Top Layer w0.508: KEY4.2@45.081,19.66 46.838,19.66 KEY4.2@49.581,19.66
  Bottom Layer w0.254: v1(42.24,47.828) 42.24,47.473 36.716,41.948 36.716,33.439 42.697,27.457 v1(42.697,27.356)
LED1(PG0): D1.2 U1.66 | length 26.5
  Top Layer w0.254: D1.2@14.732,58.75 v1(15.9,58.75) ; U1.66@33.865,63.274 33.847,63.256 33.847,61.61 33.249,61.011 33.249,59.213 34.214,58.248 v1(34.214,57.836)
  Bottom Layer w0.254: v1(15.9,58.75) 16.866,58.75 17.348,58.268 30.892,58.268 31.324,58.699 33.649,58.699 34.214,58.135 v1(34.214,57.836)
LED2(PG1): D2.2 U1.67 | length 24.4
  Top Layer w0.254: D2.2@14.732,56.653 16.013,56.653 16.612,57.252 v1(16.612,57.937) ; v1(32.436,58.039) 32.715,58.318 32.715,61.316 33.365,61.965 U1.67@33.365,63.274
  Bottom Layer w0.254: v1(16.612,57.937) 16.764,57.785 31.092,57.785 31.219,57.912 32.309,57.912 v1(32.436,58.039)
LED3(PG2): D3.2 U1.106 | length 6.8
  Top Layer w0.254: D3.2@14.732,54.556 16.579,52.708 U1.106@20.799,52.708
LED4(PG3): D4.2 U1.107 | length 6.3
  Top Layer w0.254: D4.2@14.732,52.458 14.732,52.208 U1.107@20.799,52.208
LED5(PG4): D5.2 U1.108 | length 6.6
  Top Layer w0.254: D5.2@14.732,50.361 16.079,51.708 U1.108@20.799,51.708
LED6(PG5): D6.2 U1.109 | length 7.3
  Top Layer w0.254: D6.2@14.732,48.264 14.732,48.274 17.667,51.208 U1.109@20.799,51.208
LED7(PG6): D7.2 U1.110 | length 8.8
  Top Layer w0.254: D7.2@14.732,46.166 16.332,47.767 16.332,49.191 17.849,50.708 U1.110@20.799,50.708
LED8(PG7): D8.2 U1.111 | length 10.3
  Top Layer w0.254: D8.2@14.732,44.069 16.815,46.152 16.815,48.991 18.032,50.208 U1.111@20.799,50.208
Net*1_2: BUZZER.2 Q2.3 Z1.1 | length 7.8
  Top Layer w0.635: BUZZER.2@22.428,77.571 22.428,76.962 24.994,74.397 Z1.1@24.994,73.66 25.349,73.304 Q2.3@27.686,73.304
Net*3_1: R19.1 SW.1 | length 2.4
  Top Layer w0.254: R19.1@13.886,7.275 14.01,7.152 SW.1@14.01,4.877
Net*3_2: R20.1 SW.2 | length 2.4
  Top Layer w0.254: R20.1@15.231,7.275 15.26,7.246 SW.2@15.26,4.877
Net*3_3: R21.1 SW.3 | length 2.4
  Top Layer w0.254: SW.3@16.51,4.877 16.51,7.21 R21.1@16.575,7.275
NetC7_1: C7.1 U1.81 | length 2.9
  Top Layer w0.254: U1.81@26.365,63.274 26.347,63.291 26.347,66.098 C7.1@26.416,66.167